# EAGLE board TTT (EAGLE 6.4)
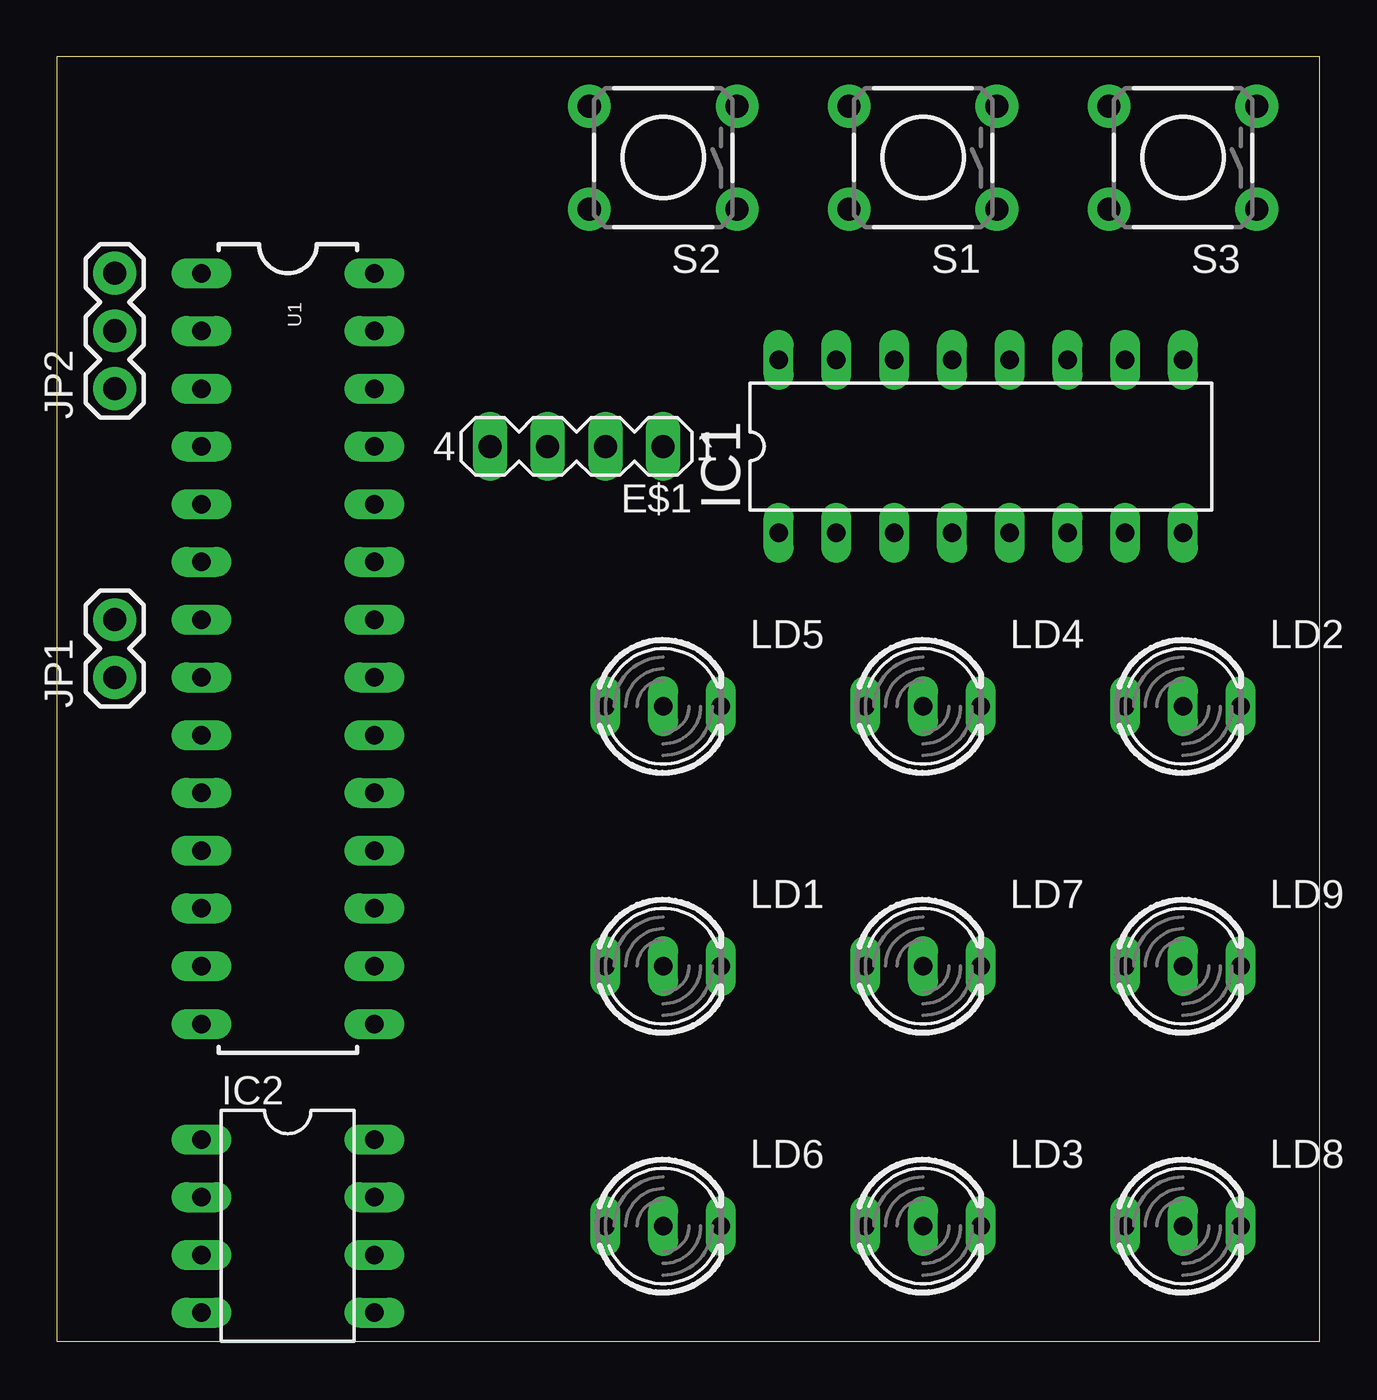
[diagram p0: board, top side]
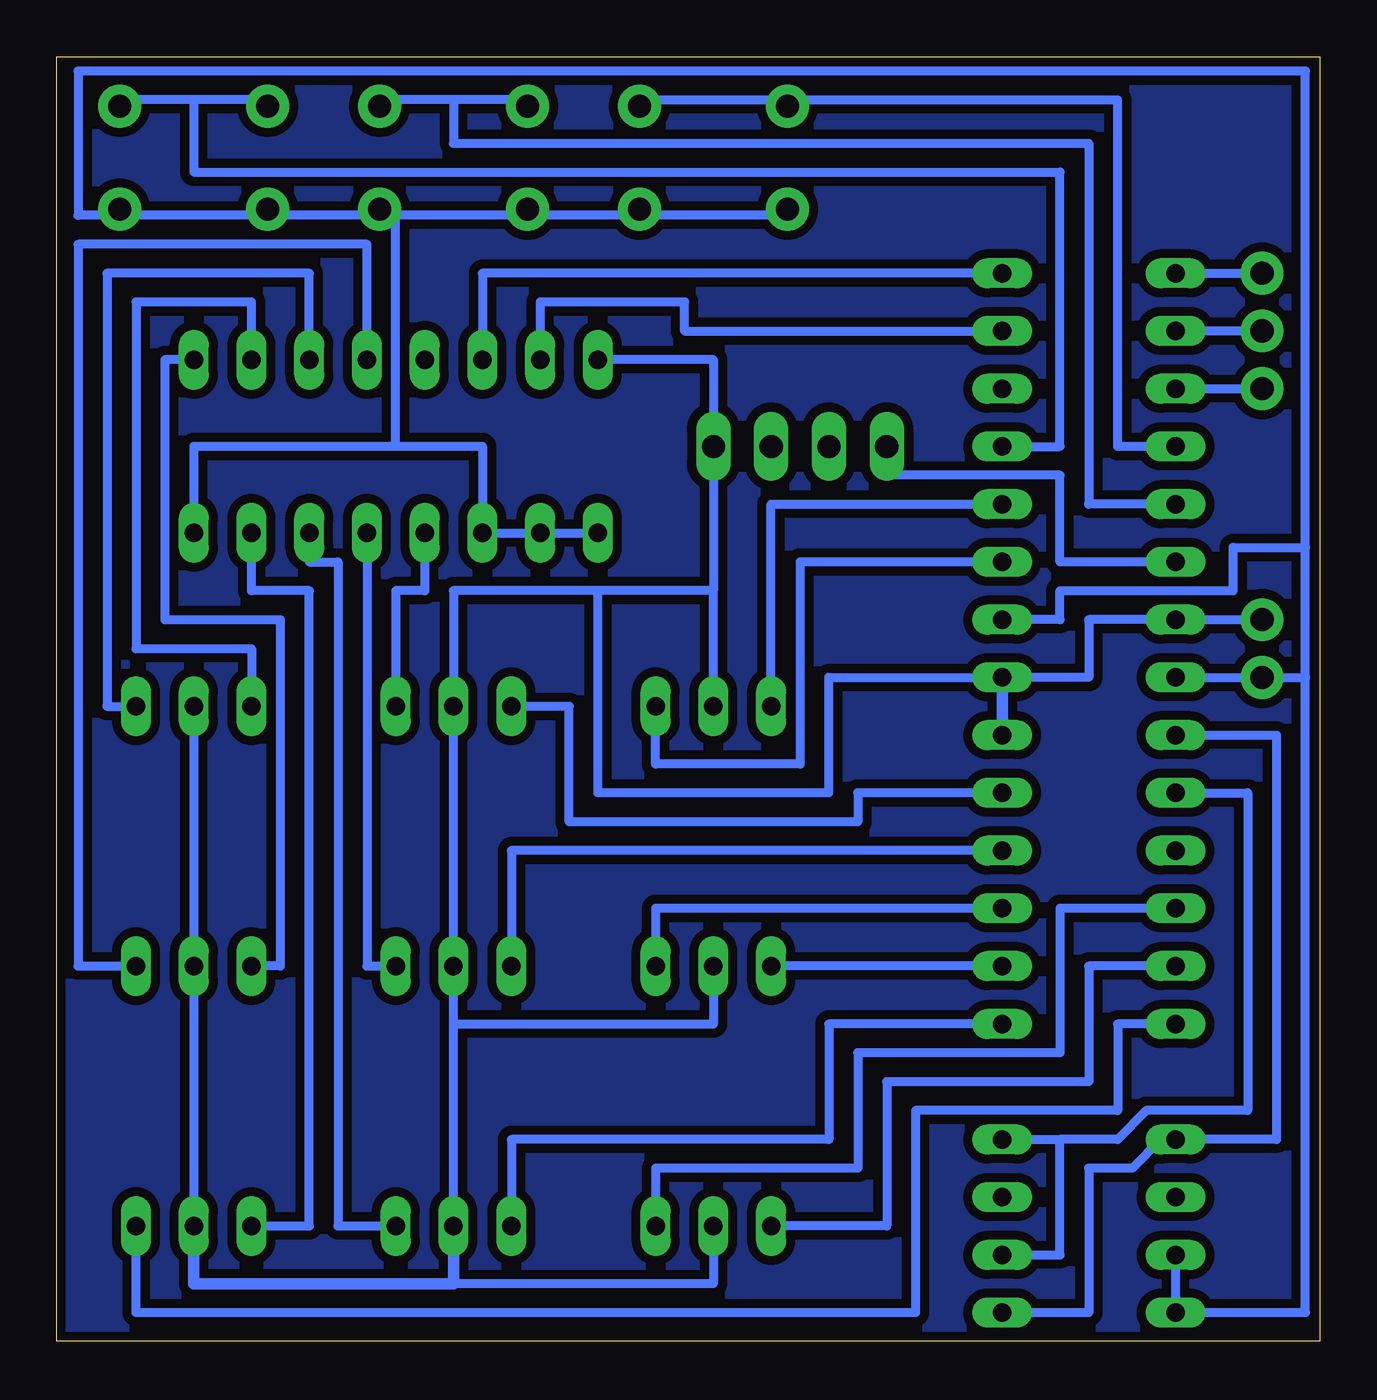
[diagram p1: board, bottom side, seen from below]

Size 55.55 x 56.51 mm. Coordinates in mm from the lower left corner, seen from the top.
Outline: 0,0 55.55,0 55.55,56.51 0,56.51 0,0
Copper layers (1*16): Top 0.035mm / dielectric 1.5mm / Bottom 0.035mm
Design rules "default": minimum track width 0.4mm, minimum drill 0.1mm, track to track 0.4mm, track to pad 0.4mm, pad to pad 0.4mm, via to via 0.4mm, smd to smd 0.4mm, copper to edge 0.4mm, drill to drill 0.4mm, minimum pad ring 10mil, minimum via ring 8mil, stop-mask expansion 4mil, vias tented up to drill 0mil, thermal gap 10mil

## Footprints (pad centres in the part's own frame; a part is rotated, then mirrored left to right if it is on the bottom)
MA04-1 = drill 1.016 long: 1 -3.81,0; 2 -1.27,0; 3 1.27,0; 4 3.81,0
DIL16 = drill 0.813 long: 1 -8.89,-3.81; 2 -6.35,-3.81; 3 -3.81,-3.81; 4 -1.27,-3.81; 5 1.27,-3.81; 6 3.81,-3.81; 7 6.35,-3.81; 8 8.89,-3.81; 9 8.89,3.81; 10 6.35,3.81; 11 3.81,3.81; 12 1.27,3.81; 13 -1.27,3.81; 14 -3.81,3.81; 15 -6.35,3.81; 16 -8.89,3.81
DIL08 = drill 0.813 long: 1 -3.81,-3.81; 2 -1.27,-3.81; 3 1.27,-3.81; 4 3.81,-3.81; 5 3.81,3.81; 6 1.27,3.81; 7 -1.27,3.81; 8 -3.81,3.81
1X02 = drill 1.016 pad 1.88: 1 0,0; 2 2.54,0
1X03 = drill 1.016 pad 1.88: 1 0,0; 2 2.54,0; 3 5.08,0
DUOLED-C-5MM = drill 0.813 long: AR 2.54,0; AX -2.54,0; C 0,0
TACTILE-PTH = drill 1.016 pad 1.88: 1 -3.251,2.261; 2 3.251,2.261; 3 -3.251,-2.261; 4 3.251,-2.261
DIL28-3 = drill 0.813 long: 1 -16.51,-3.81; 2 -13.97,-3.81; 3 -11.43,-3.81; 4 -8.89,-3.81; 5 -6.35,-3.81; 6 -3.81,-3.81; 7 -1.27,-3.81; 8 1.27,-3.81; 9 3.81,-3.81; 10 6.35,-3.81; 11 8.89,-3.81; 12 11.43,-3.81; 13 13.97,-3.81; 14 16.51,-3.81; 15 16.51,3.81; 16 13.97,3.81; 17 11.43,3.81; 18 8.89,3.81; 19 6.35,3.81; 20 3.81,3.81; 21 1.27,3.81; 22 -1.27,3.81; 23 -3.81,3.81; 24 -6.35,3.81; 25 -8.89,3.81; 26 -11.43,3.81; 27 -13.97,3.81; 28 -16.51,3.81

## Placement (x,y rotation side)
E$1  [MA04-1]  22.86,39.37 180 top
IC1  PCF8574P  [DIL16]  40.64,39.37 0 top
IC2  [DIL08]  10.16,5.08 270 top
JP1  M02PTH  [1X02]  2.54,29.21 90 top
JP2  [1X03]  2.54,41.91 90 top
LD1  [DUOLED-C-5MM]  26.67,16.51 0 top
LD2  [DUOLED-C-5MM]  49.53,27.94 0 top
LD3  [DUOLED-C-5MM]  38.1,5.08 0 top
LD4  [DUOLED-C-5MM]  38.1,27.94 0 top
LD5  [DUOLED-C-5MM]  26.67,27.94 0 top
LD6  [DUOLED-C-5MM]  26.67,5.08 0 top
LD7  [DUOLED-C-5MM]  38.1,16.51 0 top
LD8  [DUOLED-C-5MM]  49.53,5.08 0 top
LD9  [DUOLED-C-5MM]  49.53,16.51 0 top
S1  [TACTILE-PTH]  38.1,52.07 180 top
S2  [TACTILE-PTH]  26.67,52.07 180 top
S3  [TACTILE-PTH]  49.53,52.07 180 top
U1  ATMEGA328P_PDIP  [DIL28-3]  10.16,30.48 270 top

## Library data of the parts
E$1 = con-lstb
IC1 = micro-philips; MPN: PCF8574PN; OC_FARNELL: 204020; OC_NEWARK: 11N8515
IC2 = ic-package
JP1 JP2 = SparkFun-Connectors
LD1-LD9 = led
S1-S3 = SparkFun-Electromechanical
U1 = SparkFun-DigitalIC

## Nets
GND: IC1.1 IC1.2 IC1.3 IC1.8 JP1.1 U1.8 U1.22
N$4: U1.5
N$5: U1.4
N$9: IC1.4 LD4.AR
N$10: IC1.5 LD7.AR
N$11: IC1.6 LD3.AR
N$12: IC1.7 LD8.AX
N$13: IC1.9 LD9.AX
N$14: IC1.10 LD2.AX
N$15: IC1.11 LD2.AR
N$16: IC1.12 LD9.AR
N$19: LD8.AR U1.14
N$24: LD1.AR U1.17
N$25: LD7.AX U1.18
N$26: LD5.AR U1.23
N$27: LD5.AX U1.24
N$29: JP2.3 U1.1
N$30: JP2.2 U1.2
N$31: JP2.1 U1.3
S$1: LD1.AX U1.16
S$5: LD3.AX U1.15
S$6: LD4.AX U1.19
S$7: LD6.AR U1.12
S$8: LD6.AX U1.13
S$11: S1.1
S$12: E$1.4 U1.6
S$13: IC2.3 IC2.4
S$14: U1.25
SCL: IC1.14 U1.28
SDA: IC1.15 U1.27
VCC: E$1.1 IC1.16 JP1.2 LD1.C LD2.C LD3.C LD4.C LD5.C LD6.C LD7.C LD8.C LD9.C U1.7 U1.20 U1.21
XTL1: IC2.6 IC2.8 U1.10
XTL2: IC2.1 IC2.5 U1.9

## Tracks (layer width: path | path; a pad name or v marks a point on that pad's centre or on a via)
GND
  Bottom 0.406: 0.63,29.21 0.63,34.92 | 0.63,34.92 0.63,55.88 54.61,55.88 54.61,49.53 40.64,49.53 | 0.63,29.21 JP1.1 U1.8 | 0.63,1.27 0.63,29.21 | 22.86,49.53 40.64,49.53 | IC1.1 IC1.2 IC1.3 36.83,39.37 40.64,39.37 | IC1.8 49.53,39.37 40.64,39.37 | 40.64,39.37 40.64,49.53 | U1.22 11.43,31.75 11.43,33.02 3.81,33.02 3.81,34.92 0.63,34.92
N$4
  Bottom 0.406: U1.5 10.16,36.83 10.16,52.71 38.1,52.71 38.1,54.61 | 34.29,54.61 38.1,54.61 | 38.1,54.61 41.91,54.61
N$5
  Bottom 0.406: U1.4 8.89,39.37 8.89,54.61 30.48,54.61
N$9
  Bottom 0.406: IC1.4 39.37,33.02 40.64,33.02 LD4.AR
N$10
  Bottom 0.406: IC1.5 41.91,16.51 LD7.AR
N$11
  Bottom 0.406: LD3.AR 43.18,5.08 43.18,34.29 44.45,34.29 IC1.6
N$12
  Bottom 0.406: LD8.AX 44.45,5.08 44.45,33.02 46.99,33.02 IC1.7
N$13
  Bottom 0.406: IC1.9 50.8,43.18 50.8,31.75 45.72,31.75 45.72,16.51 LD9.AX
N$14
  Bottom 0.406: IC1.10 46.99,45.72 52.07,45.72 52.07,30.48 46.99,30.48 LD2.AX
N$15
  Bottom 0.406: IC1.11 44.45,46.99 53.34,46.99 53.34,27.94 LD2.AR
N$16
  Bottom 0.406: IC1.12 41.91,48.26 54.61,48.26 54.61,16.51 LD9.AR
N$19
  Bottom 0.406: LD8.AR 52.07,1.27 17.78,1.27 17.78,10.16 8.89,10.16 8.89,13.97 U1.14
N$24
  Bottom 0.406: U1.17 29.21,19.05 LD1.AR
N$25
  Bottom 0.406: U1.18 35.56,21.59 LD7.AX
N$26
  Bottom 0.406: U1.23 22.86,34.29 22.86,25.4 29.21,25.4 LD5.AR
N$27
  Bottom 0.406: LD5.AX 24.13,36.83 U1.24
N$29
  Bottom 0.406: U1.1 JP2.3
N$30
  Bottom 0.406: JP2.2 U1.2
N$31
  Bottom 0.406: U1.3 JP2.1
S$1
  Bottom 0.406: U1.16 LD1.AX
S$2
  pour Bottom: 0,56.51 55.24,56.51 55.24,0 0,0
S$5
  Bottom 0.406: U1.15 21.59,13.97 21.59,8.89 35.56,8.89 LD3.AX
S$6
  Bottom 0.406: U1.19 20.32,24.13 20.32,22.86 33.02,22.86 33.02,27.94 LD4.AX
S$7
  Bottom 0.406: U1.12 11.43,19.05 11.43,12.7 20.32,12.7 20.32,7.62 29.21,7.62 LD6.AR
S$8
  Bottom 0.406: U1.13 10.16,16.51 10.16,11.43 19.05,11.43 19.05,5.08 LD6.AX
S$12
  Bottom 0.406: U1.6 11.43,34.29 11.43,38.1 19.05,38.1 E$1.4
S$13
  Bottom 0.406: 0.63,1.27 IC2.4 IC2.3
S$14
  Bottom 0.406: 45.72,54.61 49.53,54.61 | 49.53,54.61 53.34,54.61 | 49.53,54.61 49.53,51.44 11.43,51.44 11.43,39.37 U1.25
SCL
  Bottom 0.406: U1.28 36.83,46.99 IC1.14
SDA
  Bottom 0.406: U1.27 27.94,44.45 27.94,45.72 34.29,45.72 IC1.15
VCC
  Bottom 0.406: LD8.C LD9.C LD2.C | LD3.C 38.1,13.97 | 38.1,13.97 LD7.C LD4.C 38.1,33.02 31.75,33.02 | 38.1,13.97 26.67,13.97 LD1.C | LD6.C 26.67,2.54 38.1,2.54 | LD5.C 26.67,33.02 | 26.67,33.02 31.75,33.02 | 26.67,33.02 E$1.1 26.67,43.18 IC1.16 | 31.75,33.02 31.75,24.13 21.59,24.13 21.59,29.21 U1.21 10.16,29.21 10.16,31.75 U1.7 JP1.2
  Bottom 0.508: LD8.C 49.53,2.54 38.1,2.54 LD3.C | U1.21 U1.20
XTL1
  Bottom 0.406: 11.43,8.89 8.89,8.89 7.62,10.16 3.18,10.16 3.18,24.13 U1.10 | IC2.8 11.43,8.89 | IC2.6 11.43,3.81 11.43,8.89
XTL2
  Bottom 0.406: U1.9 1.91,26.67 1.91,8.89 IC2.1 6.98,8.89 8.25,7.62 10.16,7.62 10.16,1.27 IC2.5